# Altium PCB Adapter_F.PcbDoc
Units mm, origin at the board's own origin, x right, y up, seen from the top; angles counter-clockwise.
Board outline 25 x 27 mm, 2 copper layers (Top, Bottom), stack 1.67 mm thick; 4 components, 12 nets, 46 pads, 0 vias.
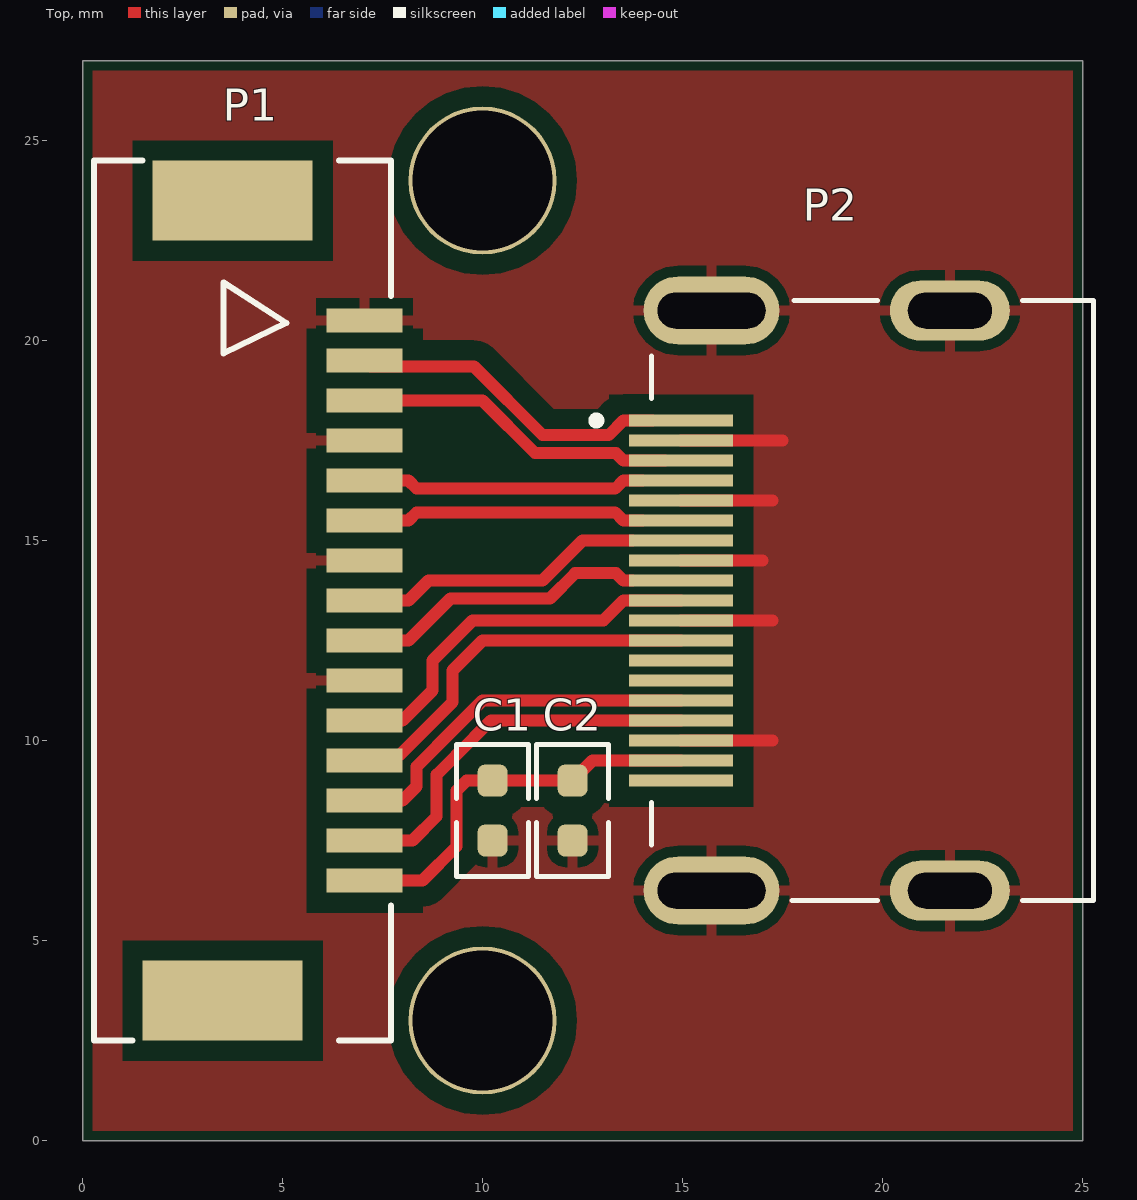
[diagram p0: Top view]
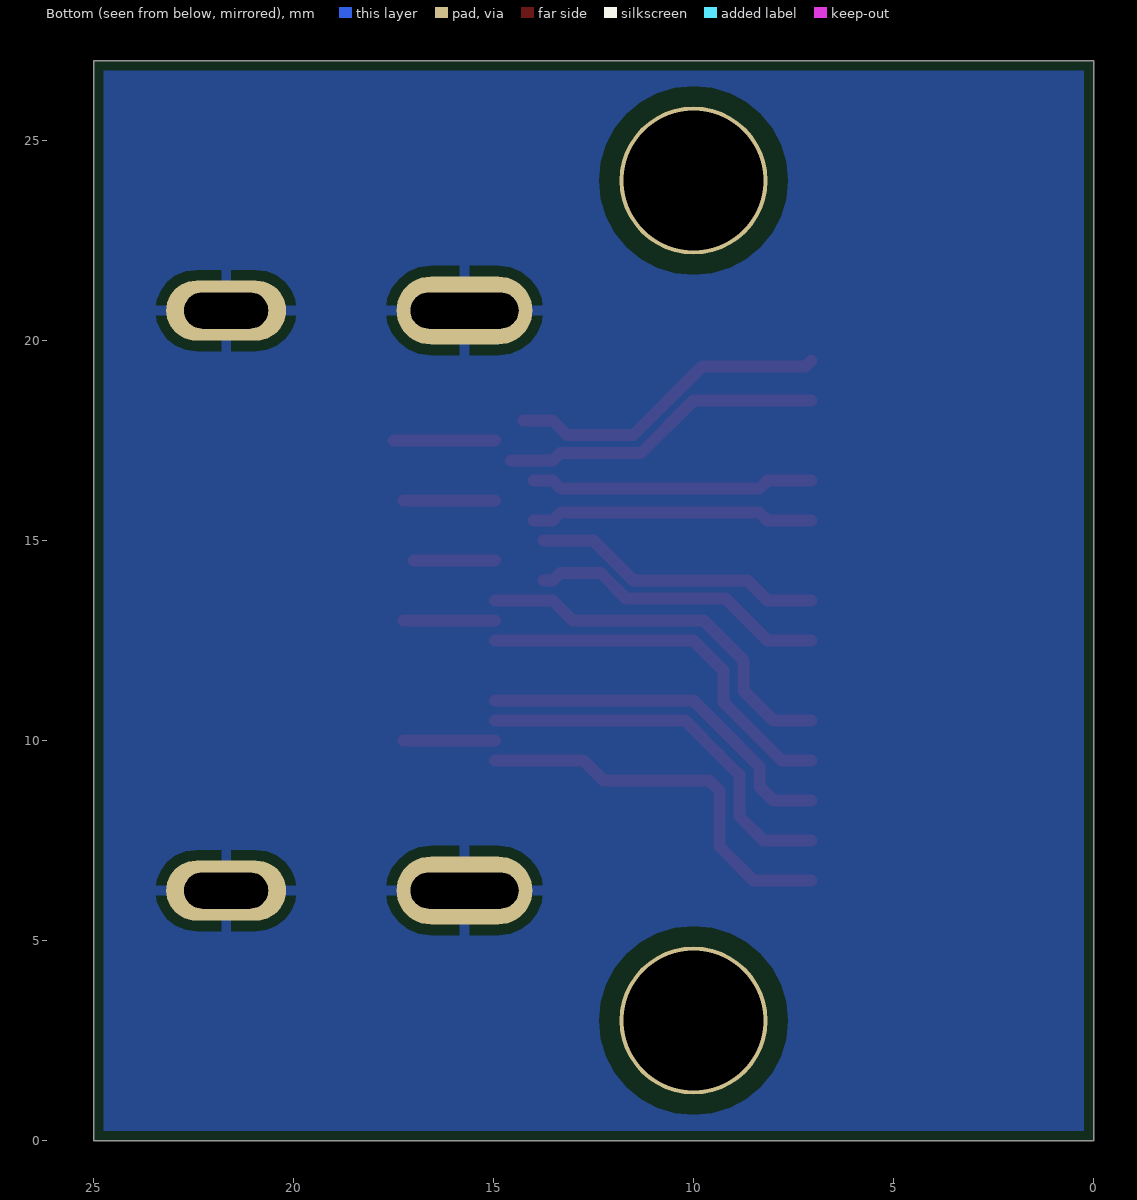
[diagram p1: Bottom view, seen from below]
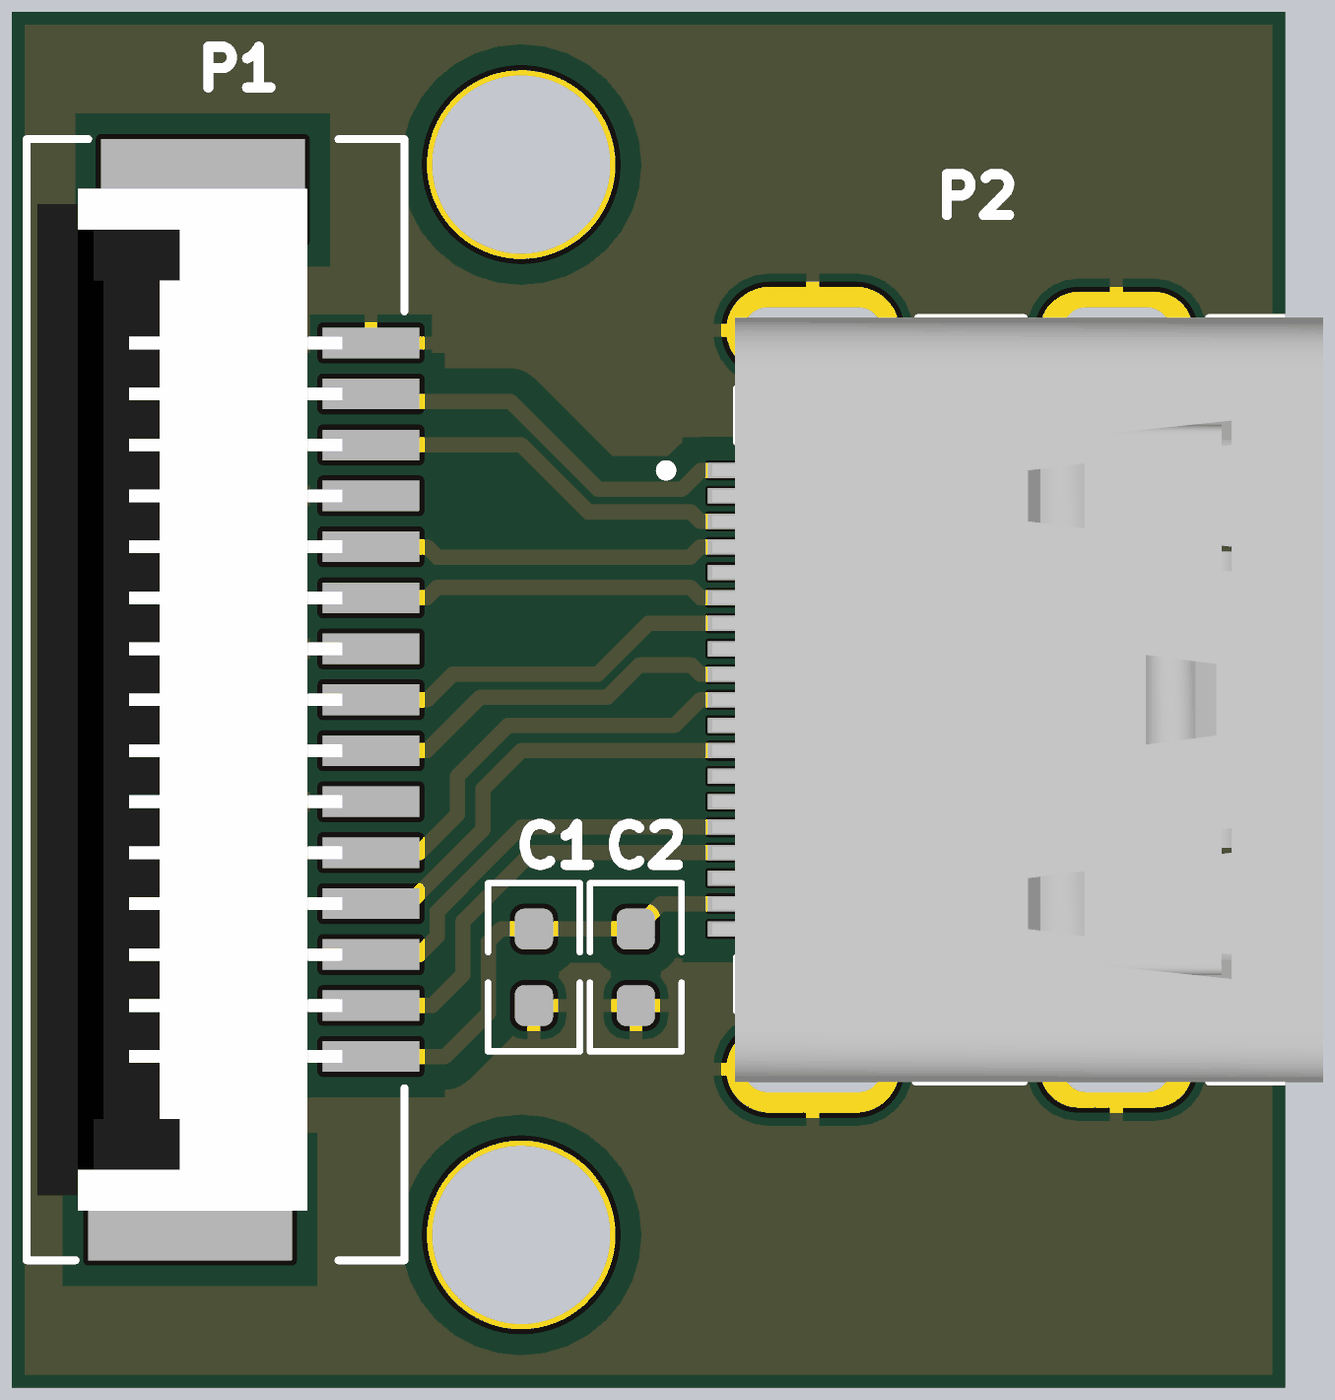
[diagram p2: 3D render of the assembled board from above, using the file's embedded part models]

## Layer stack, top to bottom
Top Solder: solder mask 0.01, Solder Resist, Dk 3.5
Top: signal copper 0.035
Dielectric 1: dielectric 1.6, FR-4, Dk 4.8
Bottom: signal copper 0.035
Bottom Solder: solder mask 0.01, Solder Resist, Dk 3.5

## Board outline
0,0 25,0 25,27 0,27

## Design rules (kind name [scope] priority, off if disabled: settings)
Clearance [All] p1: gap=0.2 except(0.15: Track-Track; 0.5: Arc-Poly Track-Poly SMDPad-Poly THPad-Poly Via-Poly Fill-Poly Poly-Poly)
ComponentClearance DG126 [HasFootprint('DG126') vs HasFootprint('DG126')] p1: gap=-1 collisioncheckmode=3 verticalgap=0.2 showdistances=FALSE
ComponentClearance [All] p2: gap=0.3 collisioncheckmode=3 verticalgap=0.2 showdistances=FALSE
DiffPairsRouting [All] p1: maxlimit=0.254 minlimit=0.254 mostfreqgap=0.15 toplayer_minwidth=0.3 toplayer_maxwidth=0.3 toplayer_prefwidth=0.3 bottomlayer_minwidth=0.3 bottomlayer_maxwidth=0.3 bottomlayer_prefwidth=0.3 maxuncoupledlength=12.7
HoleSize [All] p1: absolutevalues=TRUE maxlimit=6.3 minlimit=0.2 maxpercent=80.000 minpercent=20.000
HoleToHoleClearance [All] p1: gap=0.4 allowstackedmicrovias=TRUE
MinimumSolderMaskSliver [All] p1: minsoldermaskwidth=0.1
PlaneConnect Via_Plane_Connect [(ObjectKind = 'Via')] p1: planeconnectstyle=Direct reliefexpansion=0.508 reliefentries=4 reliefconductorwidth=0.254 reliefairgap=0.254
PlaneConnect [All] p2: planeconnectstyle=Relief reliefexpansion=0.508 reliefentries=4 reliefconductorwidth=0.254 reliefairgap=0.254
PolygonConnect Via_Poly_Connect [(ObjectKind = 'Via')] p1: connectstyle=Direct reliefconductorwidth=0.254 reliefentries=4 polygonreliefangle="90 Angle" airgapwidth=0.254
PolygonConnect [All] p2: connectstyle=Relief reliefconductorwidth=0.254 reliefentries=4 polygonreliefangle="90 Angle" airgapwidth=0.254
RoutingVias [All] p1: holewidth=0.3 width=0.6 viastyle="Through Hole" minholewidth=0.3 minwidth=0.6 maxholewidth=0.3 maxwidth=0.6
SMDNeckDown [All] p1: percent=50.000
SilkToSilkClearance [All] p1: silktosilkclearance=0.1
SilkToSolderMaskClearance [IsPad] p1: minsilkscreentomaskgap=0.1 clearancetoexposedcopper=TRUE
SolderMaskExpansion [All] p1: expansion=0.102
Width [All] p1 off: maxlimit=0.254 minlimit=0.254 preferedwidth=0.254
22 further rules are at their usual default settings.

## Classes and differential pairs
differential pair D1: +D1_P -D1_N
differential pair D0: +D0_P -D0_N
differential pair CK: +CK_P -CK_N

## Components (designator, comment, footprint, x,y, rotation, side; value= is the part's Value field where it differs from the comment)
C1 "100n" CAP_0603 10.25,8.25 r270 top
C2 "1uF" CAP_0603 12.25,8.25 r270 top
P1 "CSI_15pin" "FDC CSI 15pin" 4,13.5 r270 top
P2 "HDMI" "HDMI TYPE A" 20,13.5 r90 top

## Footprints (in the part's own frame and the unit in brackets; to place one, negate y for a bottom-side part, rotate by r counter-clockwise, add the part's x,y. Pads: shape width x height; smd on the part's side, far side on the other; paste and mask are expansions set on the pad)
CAP_0603 [mm]
  rrect50% 0.8x0.75 smd: 1(-0.75,0) 2(0.75,0)
  silkscreen extent -1.65,-0.9 1.65,0.9, body extent -0.8,-0.4 0.8,0.4, height 0.3
"FDC CSI 15pin" [mm]
  rect 0.6x1.9 smd paste+0 mask+0.102: 1(-7,3.05) 2(-6,3.05) 3(-5,3.05) 4(-4,3.05) 5(-3,3.05) 6(-2,3.05) 7(-1,3.05) 8(0,3.05) 9(1,3.05) 10(2,3.05) 11(3,3.05) 12(4,3.05) 13(5,3.05) 14(6,3.05) 15(7,3.05)
  rect 2x4 smd paste+0 mask+0.102: 16(-10,-0.25) 17(10,-0.5)
  silkscreen extent -11,-3.71 11,3.71, body extent -10.03,-3.5 10.03,2.5, height 2
"HDMI TYPE A" [mm]
  rect 0.3x2.6 smd paste+0 mask+0.05: 1(4.5,5.035) 2(4,5.035) 3(3.5,5.035) 4(3,5.035) 5(2.5,5.035) 6(2,5.035) 7(1.5,5.035) 8(1,5.035) 9(0.5,5.035) 10(0,5.035) 11(-0.5,5.035) 12(-1,5.035) 13(-1.5,5.035) 14(-2,5.035) 15(-2.5,5.035) 16(-3,5.035) 17(-3.5,5.035) 18(-4,5.035) 19(-4.5,5.035)
  oval 1.5x3 hole 0.9 slot 2.1 at 90 deg mask+0.102: S1(-7.25,-1.685) S1(7.25,-1.685)
  oval 1.7x3.4 hole 0.9 slot 2.7 at 90 deg mask+0.102: S1(-7.25,4.275) S1(7.25,4.275)
  silkscreen extent -7.5,-5.28 7.5,7.25, body extent -7.5,-5.75 7.5,6.25, height 6.18

## Part data
C1 C2: library part Capacitor
P1: library part "Port 17"
P2: library part "Port 20"

## Free pads (board coordinates)
  round 3.7 hole 3.5: 0(10,3) 0(10,24)

## Nets (pads, with @x,y where several pads share a name; then routed paths per layer and width w, separated by ;. In a path a pad name is that pad's centre, name@x,y a point inside that pad or via, vN(x,y) a via of type N, cw(c..) or ccw(c..) an arc to the next point about the centre after c; other vN are vias at no path point)
CK_N: P1.8 P2.7 | length 7.3
  Top w0.3: P1.8 8.15,13.5 8.65,14 11.5,14 12.5,15 P2.7@13.75,15
CK_P: P1.9 P2.9 | length 7.5
  Top w0.3: P1.9 8.15,12.5 9.2,13.55 11.686,13.55 12.318,14.182 13.338,14.182 13.52,14 P2.9@13.75,14
D0_N: P1.2 P2.1 | length 8.1
  Top w0.3: P1.2 7.2,19.35 9.786,19.35 11.505,17.632 13.152,17.632 13.52,18 P2.1@14.25,18
D0_P: P1.3 P2.3 | length 8.1
  Top w0.3: P1.3 10,18.5 11.318,17.182 13.338,17.182 13.52,17 P2.3@14.568,17
D1_N: P1.5 P2.4 | length 7.1
  Top w0.3: P1.5 8.15,16.5 8.355,16.295 13.315,16.295 13.52,16.5 P2.4@14,16.5
D1_P: P1.6 P2.6 | length 7.1
  Top w0.3: P1.6 8.15,15.5 8.355,15.705 13.315,15.705 13.52,15.5 P2.6@14,15.5
GND: C1.2 C2.2 P1.1 P1.4 P1.7 P1.10 P2.2 P2.5 P2.8 P2.11 P2.17 P2.S1 | length 11.4
  Top w0.3: P2.17 17.25,10 ; P2.11 17.25,13 ; P2.8 17,14.5 ; P2.5 17.25,16 ; P2.2 17.5,17.5
NetP1_11: P1.11 P2.10 | length 9.6
  Top w0.3: P1.11 8,10.5 8.75,11.25 8.75,12 9.75,13 13.02,13 13.52,13.5 P2.10
NetP1_12: P1.12 P2.12 | length 9.6
  Top w0.3: P1.12 7.795,9.5 8.35,10.055 8.35,10.057 9.25,10.957 9.25,11.75 10,12.5 P2.12
NetP1_13: P1.13 P2.15 | length 9.7
  Top w0.3: P1.13@7.5,8.5 P1.13 8,8.5 8.35,8.85 8.35,9.348 8.85,9.848 8.85,9.85 10,11 P2.15
NetP1_14: P1.14 P2.16 | length 9.8
  Top w0.3: P1.14 8.25,7.5 8.855,8.105 8.855,9.145 9.356,9.646 9.356,9.649 10.207,10.5 P2.16
VCC: C1.1 C2.1 P1.15 P2.18 | length 10
  Top w0.3: P1.15 8.5,6.5 9.355,7.355 9.355,8.75 9.605,9 C1.1 C2.1 12.75,9.5 P2.18
pads on no net: P1.16 P1.17 P2.13 P2.14 P2.19

## Polygon pours and split planes (outlines as drawn)
GND on Bottom "Top-No Net" (solid, pour order 3): 0.25,26.75 24.75,26.75 24.75,0.25 0.25,0.25
GND on Top "Top-No Net" (solid, pour order 5): 0.25,26.75 24.75,26.75 24.75,0.25 0.25,0.25

## Silkscreen, mask and mechanical layers (free items; w line width, h text height)
Outline:
  the board outline again, w0.254